# EAGLE board breakout4 (EAGLE 7.5.0)
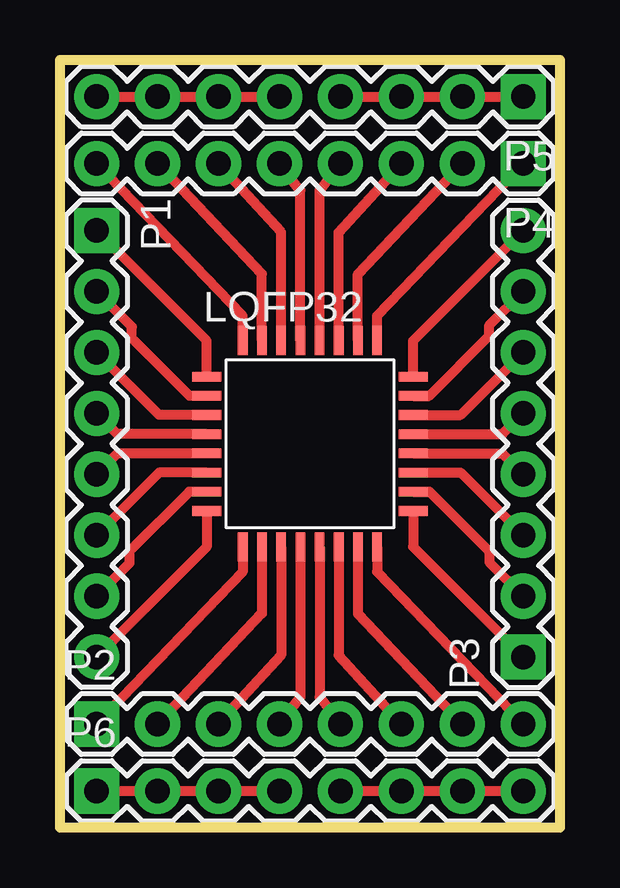
[diagram p0: board, top side]

Size 20.83 x 32 mm. Coordinates in mm from the lower left corner, seen from the top.
Outline: 0,32 20.83,32 20.83,0 0,0 0,32
Copper layers (1*16): Top 0.035mm / dielectric 1.5mm / Bottom 0.035mm
Design rules "default": minimum track width 10mil, minimum drill 24mil, track to track 8mil, track to pad 8mil, pad to pad 8mil, via to via 8mil, smd to smd 8mil, copper to edge 40mil, drill to drill 8mil, minimum pad ring 10mil, minimum via ring 8mil, stop-mask expansion 4mil, vias tented up to drill 0mil, thermal gap 10mil

## Footprints (pad centres in the part's own frame; a part is rotated, then mirrored left to right if it is on the bottom)
LQFP32-7X7 = smd 1.2 x 0.4: 1 -4.3,2.8; 2 -4.3,2; 3 -4.3,1.2; 4 -4.3,0.4; 5 -4.3,-0.4; 6 -4.3,-1.2; 7 -4.3,-2; 8 -4.3,-2.8; 17 4.3,-2.8; 18 4.3,-2; 19 4.3,-1.2; 20 4.3,-0.4; 21 4.3,0.4; 22 4.3,1.2; 23 4.3,2; 24 4.3,2.8 | smd 0.4 x 1.2: 9 -2.8,-4.3; 10 -2,-4.3; 11 -1.2,-4.3; 12 -0.4,-4.3; 13 0.4,-4.3; 14 1.2,-4.3; 15 2,-4.3; 16 2.8,-4.3; 25 2.8,4.3; 26 2,4.3; 27 1.2,4.3; 28 0.4,4.3; 29 -0.4,4.3; 30 -1.2,4.3; 31 -2,4.3; 32 -2.8,4.3
1X08 = drill 1.016 pad 1.88 square: 1 0,0 | drill 1.016 pad 1.88: 2 2.54,0; 3 5.08,0; 4 7.62,0; 5 10.16,0; 6 12.7,0; 7 15.24,0; 8 17.78,0

## Placement (x,y rotation side)
LQFP32  [LQFP32-7X7]  10.41,16 0 top
P1  [1X08]  1.52,24.89 270 top
P2  [1X08]  1.52,4.32 0 top
P3  [1X08]  19.3,7.11 90 top
P4  [1X08]  19.3,27.69 180 top
P5  [1X08]  19.3,30.48 180 top
P6  [1X08]  1.52,1.52 0 top

## Library data of the parts
LQFP32 = st-microelectronics
P1-P6 = SparkFun-Connectors

## Nets
BOOT0: LQFP32.31 P4.7
GND: LQFP32.16 P2.8
PA3: LQFP32.9 P2.1
PA4: LQFP32.10 P2.2
PA5: LQFP32.11 P2.3
PA6: LQFP32.12 P2.4
PA7: LQFP32.13 P2.5
PA15: LQFP32.25 P4.1
PB0: LQFP32.14 P2.6
PB1: LQFP32.15 P2.7
PB3: LQFP32.26 P4.2
PB4: LQFP32.27 P4.3
PB5: LQFP32.28 P4.4
PB6: LQFP32.29 P4.5
PB7: LQFP32.30 P4.6
S$3: P6.1 P6.2 P6.3 P6.4
S$5: LQFP32.32 P4.8
S$7: P6.5 P6.6 P6.7 P6.8
S$8: P5.1 P5.2 P5.3 P5.4
S$9: P5.5 P5.6 P5.7 P5.8
S$10: LQFP32.1 P1.1
S$11: LQFP32.2 P1.2
S$12: LQFP32.3 P1.3
S$13: LQFP32.4 P1.4
S$14: LQFP32.5 P1.5
S$15: LQFP32.6 P1.6
S$16: LQFP32.7 P1.7
S$17: LQFP32.8 P1.8
S$18: LQFP32.24 P3.8
S$19: LQFP32.23 P3.7
S$20: LQFP32.22 P3.6
S$21: LQFP32.21 P3.5
S$22: LQFP32.20 P3.4
S$23: LQFP32.19 P3.3
S$24: LQFP32.18 P3.2
S$25: LQFP32.17 P3.1

## Tracks (layer width: path | path; a pad name or v marks a point on that pad's centre or on a via)
BOOT0
  Top 0.406: LQFP32.31 8.41,23.08 P4.7
GND
  Top 0.406: LQFP32.16 13.21,10.66 P2.8
PA3
  Top 0.406: LQFP32.9 7.61,10.66 P2.1
PA4
  Top 0.406: LQFP32.10 8.41,8.92 P2.2
PA5
  Top 0.406: LQFP32.11 9.21,7.18 P2.3
PA6
  Top 0.406: LQFP32.12 10.01,5.44 P2.4
PA7
  Top 0.406: LQFP32.13 10.81,5.44 P2.5
PA15
  Top 0.406: LQFP32.25 13.21,21.34 P4.1
PB0
  Top 0.406: LQFP32.14 11.61,7.18 P2.6
PB1
  Top 0.406: LQFP32.15 12.41,8.92 P2.7
PB3
  Top 0.406: LQFP32.26 12.41,23.08 P4.2
PB4
  Top 0.406: LQFP32.27 11.61,24.82 P4.3
PB5
  Top 0.406: LQFP32.28 10.81,26.56 P4.4
PB6
  Top 0.406: LQFP32.29 10.01,26.56 P4.5
PB7
  Top 0.406: LQFP32.30 9.21,24.82 P4.6
S$3
  Top 0.406: P6.4 P6.3 P6.2 P6.1
S$5
  Top 0.406: LQFP32.32 7.61,21.34 P4.8
S$7
  Top 0.406: P6.8 P6.7 P6.6 P6.5
S$8
  Top 0.406: P5.4 P5.3 P5.2 P5.1
S$9
  Top 0.406: P5.8 P5.7 P5.6 P5.5
S$10
  Top 0.406: LQFP32.1 6.11,20.3 P1.1
S$11
  Top 0.406: LQFP32.2 5.4,18 2.99,20.41 2.99,20.88 P1.2
S$12
  Top 0.406: LQFP32.3 4.13,17.2 P1.3
S$13
  Top 0.406: LQFP32.4 2.39,16.4 P1.4
S$14
  Top 0.406: LQFP32.5 2.39,15.6 P1.5
S$15
  Top 0.406: LQFP32.6 4.13,14.8 P1.6
S$16
  Top 0.406: LQFP32.7 5.38,14 2.89,11.51 2.89,11.02 P1.7
S$17
  Top 0.406: LQFP32.8 6.11,11.7 P1.8
S$18
  Top 0.406: LQFP32.24 14.71,20.3 P3.8
S$19
  Top 0.406: LQFP32.23 15.38,18 17.89,20.51 17.89,20.94 P3.7
S$20
  Top 0.406: LQFP32.22 16.69,17.2 P3.6
S$21
  Top 0.406: LQFP32.21 18.43,16.4 P3.5
S$22
  Top 0.406: LQFP32.20 18.43,15.6 P3.4
S$23
  Top 0.406: LQFP32.19 16.69,14.8 P3.3
S$24
  Top 0.406: LQFP32.18 15.4,14 17.89,11.51 17.89,11.06 P3.2
S$25
  Top 0.406: LQFP32.17 14.71,11.7 P3.1